# Altium PCB SGK_DVR_01.PcbDoc (part 3 of 7)
Units mil, origin at the board's own origin, x right, y up, seen from the top; angles counter-clockwise.
Board outline 3070.87 x 2598.47 mil, 6 copper layers (Top, L2 GND, l3 POWER, L4 SIG, L5 GND, Bottom), stack 58.1 mil thick; 475 components, 339 nets, 1964 pads, 1036 vias.
Unrouted connection lines stored in the file: 522.
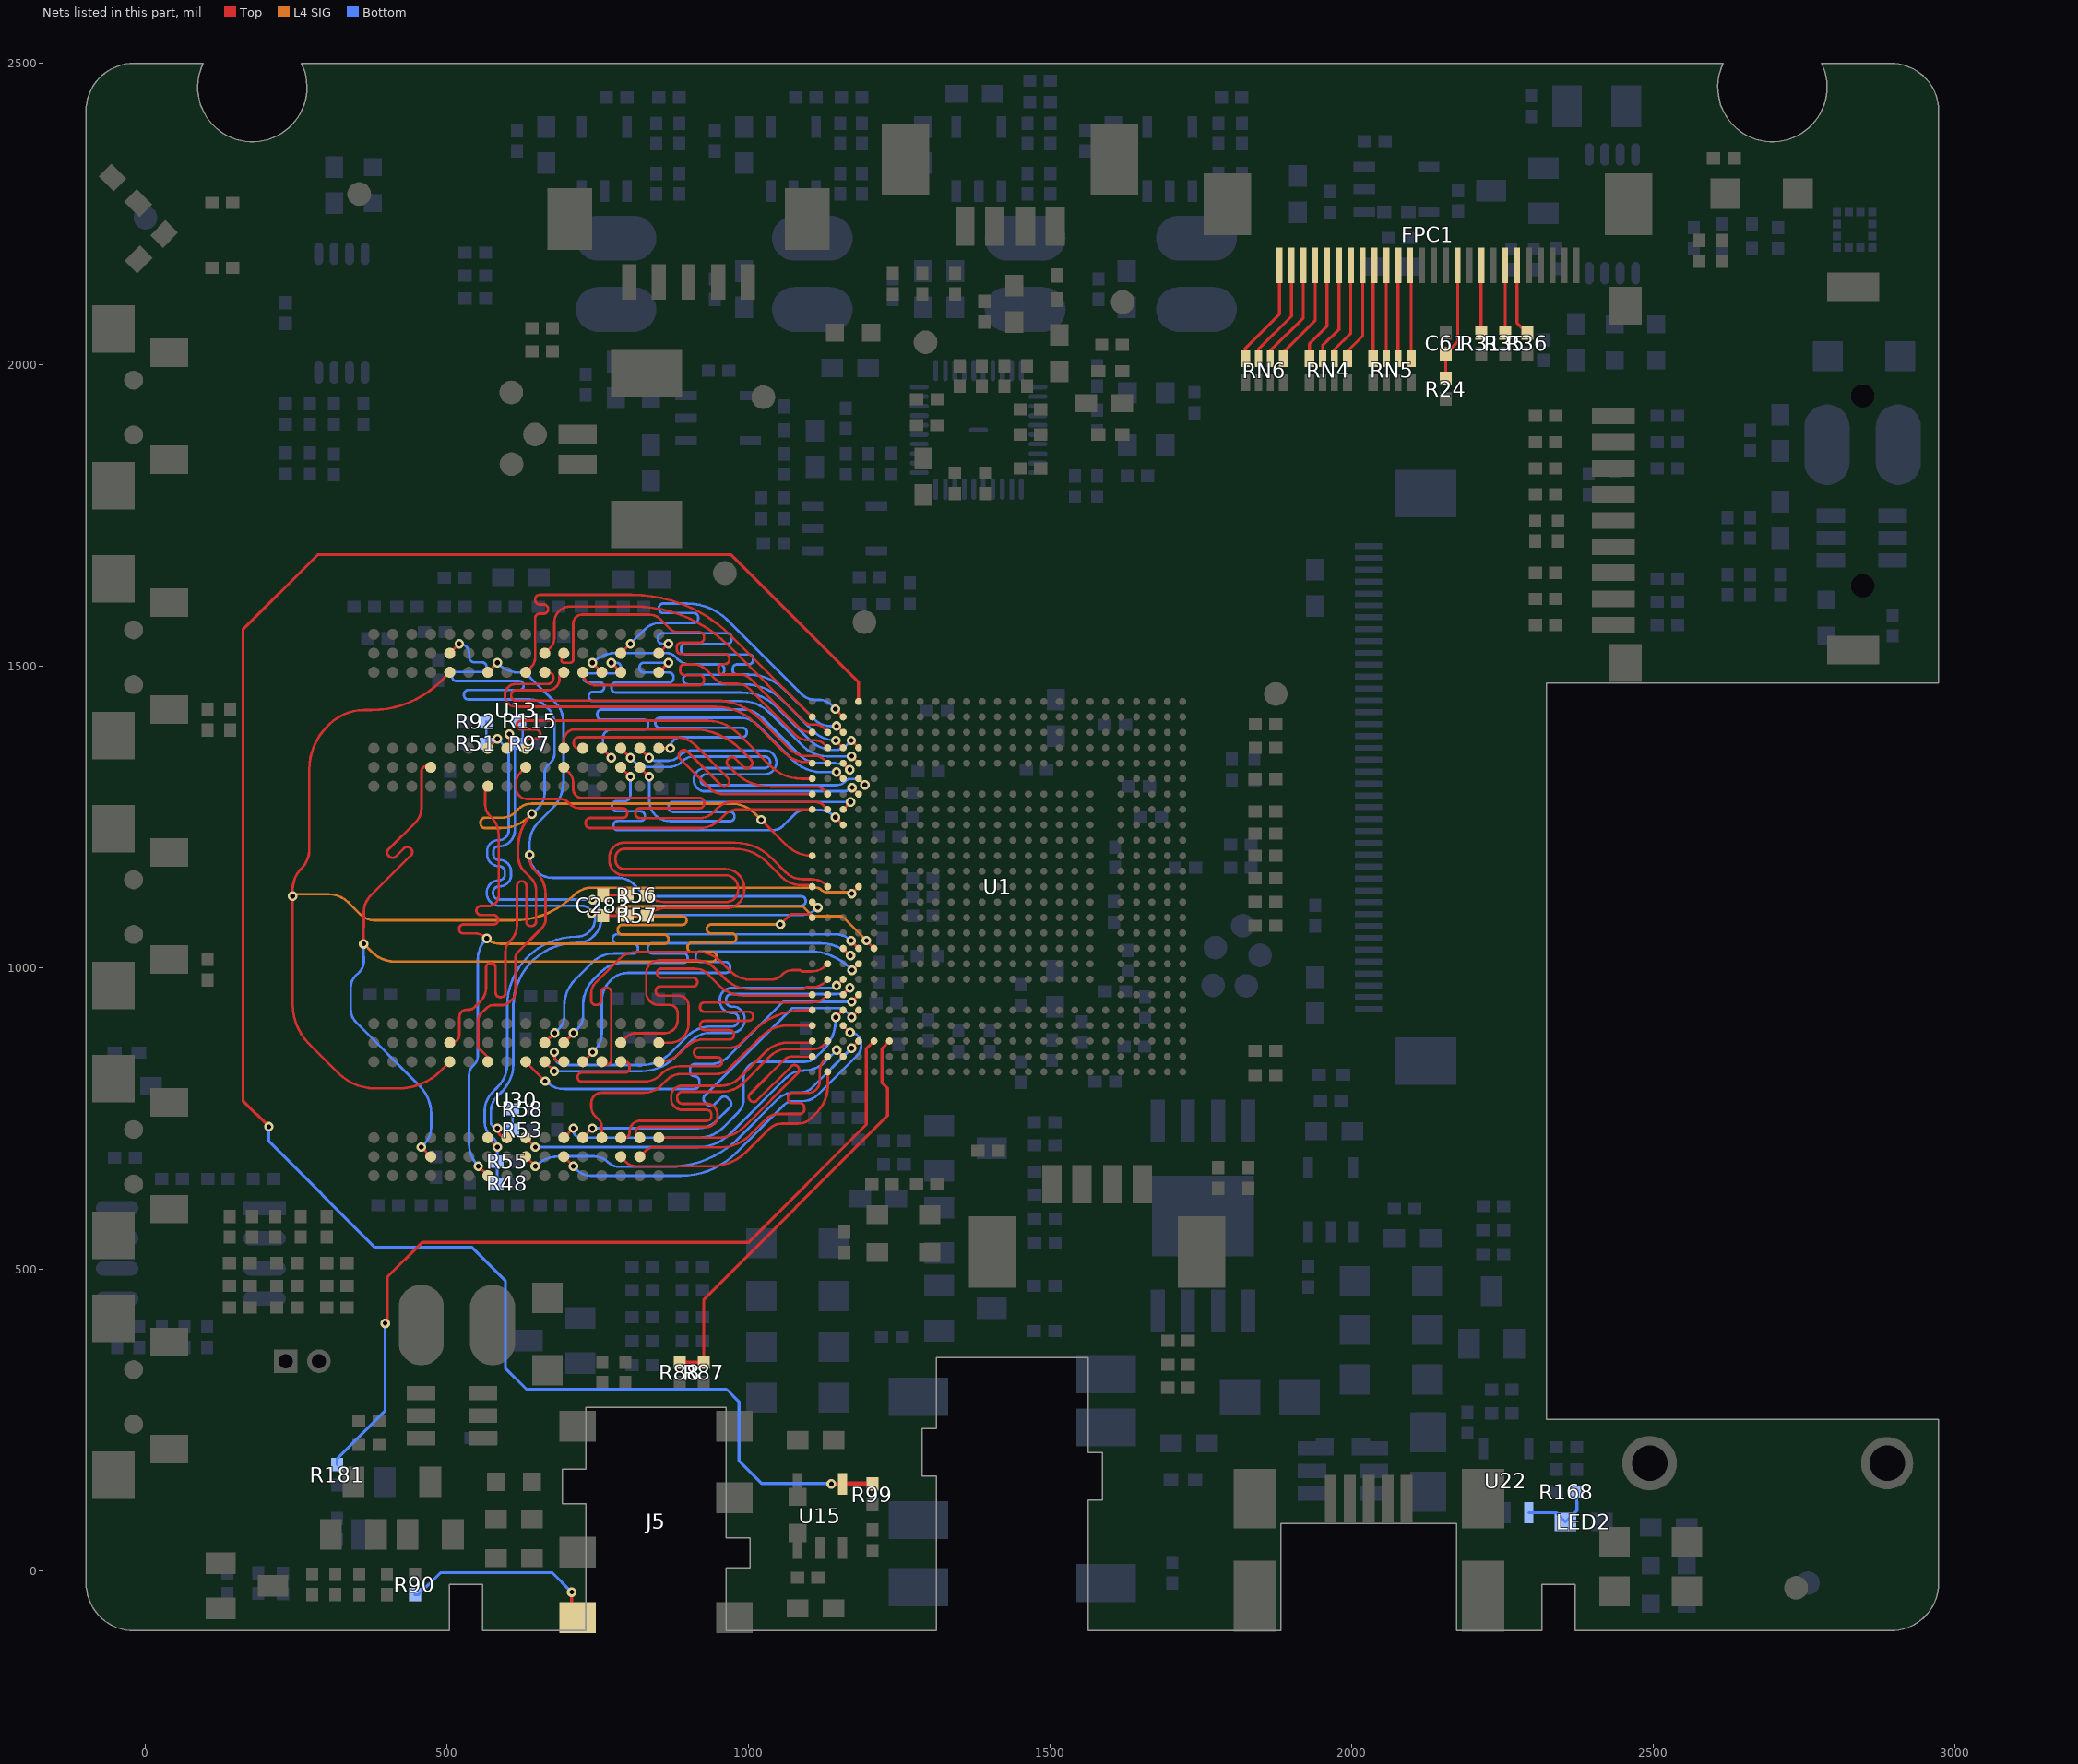
[diagram p5: the nets of this part, all layers, seen from the top]

## Via types
v1: diameter 15.75, hole 7.87, Top to Bottom, 800 vias
v2: diameter 20, hole 12, Top to Bottom, 204 vias
v3: diameter 23.62, hole 11.81, Top to Bottom, 31 vias
v4: diameter 14, hole 8, Top to Bottom, 1 vias

## Nets (pads, with @x,y where several pads share a name; then routed paths per layer and width w, separated by ;. In a path a pad name is that pad's centre, name@x,y a point inside that pad or via, vN(x,y) a via of type N, cw(c..) or ccw(c..) an arc to the next point about the centre after c; other vN are vias at no path point) (continued)
BA0: U1.AE11 U13.M2 U30.M2 | length 2469.7
  Top w4.2: U30.M2@504.55,876.27 506.78,876.27 ccw(c506.78,889.97) 520.47,889.97 520.47,918.89 cw(c532.46,918.89) 532.46,930.88 534.93,930.88 ccw(c534.93,946.47) 545.96,935.45 554.79,944.27 ccw(c531.22,967.84) 564.55,967.84 564.55,1000.94 cw(c571.9,1000.94) 571.9,1008.29 573.11,1008.29 cw(c573.11,1000.94) 580.46,1000.94 580.46,959.15 ccw(c587.81,959.15) 587.81,951.8 589.58,951.8 ccw(c589.58,959.15) 596.93,959.15 596.93,1027.69 cw(c620.56,1027.69) 603.85,1044.4 605.4,1045.94 ccw(c579.92,1071.42) 615.95,1071.42 615.95,1136.71 cw(c623.3,1136.71) 623.3,1144.06 623.99,1144.06 cw(c623.99,1136.71) 631.34,1136.71 631.34,1077.15 ccw(c638.69,1077.15) 638.69,1069.8 640.08,1069.8 ccw(c640.08,1077.15) 647.43,1077.15 647.43,1129.38 ccw(c619.48,1129.38) 639.24,1149.14 628.54,1159.84 cw(c654.4,1185.7) 617.83,1185.7 617.83,1200.27 cw(c695.94,1200.27) 639.06,1253.79 640.71,1255.45 v1(640.71,1255.5) ; U13.M2@504.55,1521.94 v1(520.29,1537.69) ; v1(1020.62,1245.85) 1062.56,1203.91 ; 1062.56,1203.91 ccw(c1105.34,1246.7) U1.AE11@1105.34,1186.19 cw(c1105.34,1246.7) 1062.56,1203.91
  L4 SIG w4.2: v1(640.71,1255.5) v1@637.3,1252.09 ; v1(1020.62,1245.85) 1009.86,1256.61 ; 555.54,1239.38 ccw(c562.89,1239.38) 562.89,1232.03 ; 555.54,1239.38 ccw(c562.89,1239.38) 562.89,1232.03 ; 555.54,1239.38 555.54,1241.93 ; 555.54,1241.93 cw(c562.89,1241.93) 562.89,1249.28 ; 555.54,1241.93 cw(c562.89,1241.93) 562.89,1249.28 ; 562.89,1232.03 588.87,1232.03 ; 562.89,1249.28 591.02,1249.28 ; 588.87,1232.03 ccw(c588.87,1300.51) v1@637.3,1252.09 ; 588.87,1232.03 ccw(c588.87,1300.51) v1@637.3,1252.09 ; 591.02,1249.28 ccw(c591.02,1279.78) 612.58,1258.21 ; 591.02,1249.28 ccw(c591.02,1279.78) 612.58,1258.21 ; 591.02,1249.28 ccw(c591.02,1279.78) 612.58,1258.21 ; 591.02,1249.28 ccw(c591.02,1279.78) 612.58,1258.21 ; 591.02,1249.28 ccw(c591.02,1279.78) 612.58,1258.21 ; 591.02,1249.28 ccw(c591.02,1279.78) 612.58,1258.21 ; 612.58,1258.21 617.75,1263.38 ; 617.75,1263.38 cw(c640.31,1240.82) 640.31,1272.73 ; 617.75,1263.38 cw(c640.31,1240.82) 640.31,1272.73 ; 640.31,1272.73 970.95,1272.73 ; 970.95,1272.73 cw(c970.95,1217.69) 1009.86,1256.61 ; 970.95,1272.73 cw(c970.95,1217.69) 1009.86,1256.61
  Bottom w4.2: v1(520.29,1537.69) cw(c520.29,1521.38) 536.61,1521.38 536.61,1516.51 ccw(c546.24,1516.51) 546.24,1506.88 558.11,1506.88 cw(c558.11,1499.53) 565.46,1499.53 565.46,1498.23 cw(c558.11,1498.23) 558.11,1490.88 515.57,1490.88 ccw(c515.57,1483.53) 508.22,1483.53 508.22,1483.28 ccw(c515.57,1483.28) 515.57,1475.93 619.69,1475.93 cw(c619.69,1468.58) 627.04,1468.58 627.04,1468.45 cw(c619.69,1468.45) 619.69,1461.1 535.23,1461.1 ccw(c535.23,1453.75) 527.88,1453.75 527.88,1452.7 ccw(c535.23,1452.7) 535.23,1445.35 637.91,1445.35 cw(c637.91,1409.61) 663.18,1434.88 667.52,1430.54 cw(c642.19,1405.21) 678.01,1405.21 678.01,1355.7 cw(c656.97,1355.7) 671.85,1340.83 667.18,1336.15 ccw(c680.67,1322.66) 661.59,1322.66 661.59,1289.78 cw(c629.22,1289.78) 652.11,1266.89 v1(640.71,1255.5)
BA1: U1.AE15 U13.N8 U30.N8 | length 1971.1
  Top w4.2: v1(361.8,1040.07) 361.93,1093.36 cw(c398.97,1093.36) 372.78,1119.55 440.31,1187.08 ; 440.32,1187.09 ccw(c435.11,1192.28) 442.46,1192.28 ccw(c435.11,1192.28) 440.31,1197.48 439.03,1198.75 ccw(c433.83,1193.56) 433.83,1200.91 ccw(c433.83,1193.56) 428.64,1198.75 414.83,1184.95 cw(c409.63,1190.14) 409.63,1182.79 cw(c409.63,1190.14) 404.44,1184.95 402.91,1186.47 cw(c408.11,1191.67) 400.76,1191.67 cw(c408.11,1191.67) 402.91,1196.87 447.63,1241.59 ccw(c423.97,1265.25) 457.43,1265.25 457.43,1326.1 cw(c466.14,1326.1) 460.78,1332.96 cw(c466.14,1326.1) 466.14,1334.81 471.2,1334.81 cw(c471.2,1332.96) U13.N8@473.05,1332.96 ; v1(457.3,703.04) U30.N8@473.05,687.29 ; v1(1052.52,1072.38) 1069.82,1089.68 1099.49,1089.68 U1.AE15@1105.34,1083.83
  L4 SIG w4.2: v1(361.8,1040.07) 374.92,1026.95 ; v1(1052.52,1072.38) 937.85,1072.38 ; 374.92,1026.95 ccw(c413.85,1065.88) 413.85,1010.82 ; 374.92,1026.95 ccw(c413.85,1065.88) 413.85,1010.82 ; 413.85,1010.82 939.46,1010.82 ; 898.52,1033.8 ccw(c905.87,1033.8) 905.87,1026.45 ; 898.52,1033.8 ccw(c905.87,1033.8) 905.87,1026.45 ; 898.52,1033.8 898.52,1034.86 ; 898.52,1034.86 cw(c905.87,1034.86) 905.87,1042.21 ; 898.52,1034.86 cw(c905.87,1034.86) 905.87,1042.21 ; 905.87,1026.45 939.46,1026.45 ; 905.87,1042.21 972.12,1042.21 ; 930.5,1064.71 ccw(c937.85,1064.71) 937.85,1057.36 ; 930.5,1064.71 ccw(c937.85,1064.71) 937.85,1057.36 ; 930.5,1064.71 930.5,1065.03 ; 930.5,1065.03 cw(c937.85,1065.03) 937.85,1072.38 ; 930.5,1065.03 cw(c937.85,1065.03) 937.85,1072.38 ; 937.85,1057.36 972.12,1057.36 ; 939.46,1010.82 ccw(c939.46,1018.17) 946.81,1018.17 ; 939.46,1010.82 ccw(c939.46,1018.17) 946.81,1018.17 ; 939.46,1026.45 cw(c939.46,1019.1) 946.81,1019.1 ; 939.46,1026.45 cw(c939.46,1019.1) 946.81,1019.1 ; 946.81,1018.17 946.81,1019.1 ; 972.12,1042.21 ccw(c972.12,1049.56) 979.47,1049.56 ; 972.12,1042.21 ccw(c972.12,1049.56) 979.47,1049.56 ; 972.12,1057.36 cw(c972.12,1050.01) 979.47,1050.01 ; 972.12,1057.36 cw(c972.12,1050.01) 979.47,1050.01 ; 979.47,1049.56 979.47,1050.01
  Bottom w4.2: v1(361.8,1040.07) 361.8,1028.59 361.83,1028.55 361.9,1010.56 361.9,1010.48 cw(c338.19,1010.48) 354.95,993.72 347.76,986.53 ccw(c366.12,968.17) 340.16,968.17 340.16,932.53 ccw(c372.69,932.53) 349.68,909.54 454.23,804.91 cw(c407.23,757.94) 473.67,757.94 473.67,736.77 cw(c431.77,736.77) 461.4,707.14 v1(457.3,703.04)
BA2: U1.AB13 U13.M3 U30.M3 | length 2434.6
  Top w4.2: U30.M3@504.55,844.78 489.07,829.3 cw(c419.82,898.56) 419.82,800.62 380.63,800.62 cw(c380.63,886.41) 319.96,825.75 271.04,874.67 cw(c336.3,939.94) 244,939.94 v1(244,1119.4) 244,1129.24 cw(c295.98,1129.24) 259.23,1166 ccw(c229.44,1195.78) 271.57,1195.78 271.57,1329.17 cw(c371.84,1329.17) 300.94,1400.08 304.96,1404.1 cw(c362.63,1346.44) 362.63,1427.99 375.23,1427.99 ccw(c375.23,1589.42) 489.37,1475.27 U13.M3@504.55,1490.44 ; v1(1170.98,1123.4) U1.AB13@1182.11,1135.01
  L4 SIG w4.2: v1(1170.98,1123.4) 1168.62,1125.75 1130.68,1125.75 ; v1@251.25,1122.4 ccw(c251.25,1112.16) v1(244,1119.4) cw(c251.25,1112.16) v1@251.25,1122.4 ; v1@251.25,1122.4 303.9,1122.4 ; 303.9,1122.4 cw(c303.9,1076.52) 336.34,1108.96 ; 303.9,1122.4 cw(c303.9,1076.52) 336.34,1108.96 ; 303.9,1122.4 cw(c303.9,1076.52) 336.34,1108.96 ; 303.9,1122.4 cw(c303.9,1076.52) 336.34,1108.96 ; 303.9,1122.4 cw(c303.9,1076.52) 336.34,1108.96 ; 303.9,1122.4 cw(c303.9,1076.52) 336.34,1108.96 ; 336.34,1108.96 356.67,1088.64 ; 356.67,1088.64 ccw(c379.67,1111.64) 378,1079.15 ; 356.67,1088.64 ccw(c379.67,1111.64) 378,1079.15 ; 378,1079.15 ccw(c379.67,1111.64) 379.67,1079.11 ; 378,1079.15 ccw(c379.67,1111.64) 379.67,1079.11 ; 379.67,1079.11 610.07,1079.11 ; 610.07,1079.11 ccw(c610.07,1220.03) 709.72,1120.39 ; 610.07,1079.11 ccw(c610.07,1220.03) 709.72,1120.39 ; 709.72,1120.39 710.57,1121.23 ; 710.57,1121.23 cw(c739.4,1092.4) 739.4,1133.17 ; 710.57,1121.23 cw(c739.4,1092.4) 739.4,1133.17 ; 739.4,1133.17 1112.76,1133.17 ; 1112.76,1133.18 cw(c1112.76,1123.86) 1119.35,1130.45 ; 1112.76,1133.18 cw(c1112.76,1123.86) 1119.35,1130.45 ; 1112.76,1133.18 cw(c1112.76,1123.86) 1119.35,1130.45 ; 1112.76,1133.18 cw(c1112.76,1123.86) 1119.35,1130.45 ; 1112.76,1133.18 cw(c1112.76,1123.86) 1119.35,1130.45 ; 1112.76,1133.18 cw(c1112.76,1123.86) 1119.35,1130.45 ; 1119.35,1130.45 ccw(c1130.68,1141.78) 1130.68,1125.75 ; 1119.35,1130.45 ccw(c1130.68,1141.78) 1130.68,1125.75
BC_DET: R181.2 U1.AA23 | length 1387.9
  Top w5: v1(397.38,410.98) 400.72,414.32 400.72,487.64 458.56,545.48 999.91,545.49 1195.09,740.66 1195.09,866.49 U1.AA23@1207.71,879.1
  Bottom w5: R181.2@317.88,176.89 317.88,186.79 397.38,266.29 v1(397.38,410.98)
BC_DETA: J5.4 R90.1 | length 334.9
  Top w5: v1(706.62,-34.72) 706.62,-57.82 707.07,-57.82 716.54,-67.28 J5.4@716.54,-76.77
  Bottom w5: R90.1@446.68,-38.94 452.58,-38.94 489.12,-2.4 674.3,-2.4 v1(706.62,-34.72)
BC_INDET: R87.1 R88.2 U1.Y23 | length 707.3
  Top w5: R88.2@886,346.78 R87.1@925.6,346.78 925.6,415.97 925.6,450.84 1230.27,755.5 1230.27,800.55 1220.76,810.05 1220.76,866.58 U1.Y23@1233.3,879.1
BC_PWREN: R99.1 U1.AB1 U15.4 | length 3436.3
  Top w5: v1(204.64,737.02) 161.61,780.06 161.61,1561.34 285.64,1685.37 970.7,1685.37 1182.11,1473.97 U1.AB1@1182.11,1442.1 ; v1(1136.95,144.72) U15.4@1155.68,144.72
  Top w8: U15.4@1155.68,144.72 1204.71,144.72 R99.1@1204.94,144.49
  Bottom w5: v1(204.64,737.02) 204.64,712.65 380.19,537.1 541.12,537.1 596.68,481.54 596.68,336.53 631.33,301.88 963.01,301.88 984,280.89 984,182.8 1021.28,145.53 1106.32,145.53 1136.95,145.47 v1(1136.95,144.72)
CAS#: U1.AE14 U13.K3 U30.K3 | length 2323.9
  Top w4.2: U30.K3@567.54,844.78 567.54,852.11 551.76,867.88 551.76,914.58 cw(c565.42,914.58) 555.76,924.23 565.18,933.65 cw(c577.11,921.72) 577.11,938.59 590.95,938.59 ccw(c590.95,956.8) 603.83,943.92 607.88,947.98 ccw(c594.44,961.43) 613.45,961.43 613.45,1016.34 cw(c628.66,1016.34) 617.91,1027.09 656.75,1065.93 ccw(c640.63,1082.04) 663.42,1082.04 663.42,1121.89 ccw(c610.87,1121.89) 648.03,1159.05 645.47,1161.61 cw(c665.86,1182) 637.02,1181.99 637.02,1183.95 v1(637.02,1187.58) ; U13.K3@567.54,1490.44 v1(583.29,1506.19) ; U1.AE14@1105.34,1109.42 v1(1114.74,1100.45)
  Bottom w4.2: v1(583.29,1506.19) 583.29,1505.91 585.19,1504 ccw(c618.63,1537.45) 618.63,1490.15 cw(c618.63,1463.38) 637.56,1482.31 679.31,1440.56 cw(c646.46,1407.72) 692.91,1407.72 692.91,1309.59 cw(c628.77,1309.59) 674.13,1264.23 651.09,1241.19 ccw(c685.04,1207.24) 637.02,1207.24 637.02,1191.71 v1(637.02,1187.58) ; v1(637.02,1187.58) ccw(c675.1,1187.58) 675.1,1149.5 ; v1(637.02,1187.58) ccw(c675.1,1187.58) 675.1,1149.5 ; v1(637.02,1187.58) ccw(c675.1,1187.58) 675.1,1149.5 ; v1(637.02,1187.58) ccw(c675.1,1187.58) 675.1,1149.5 ; v1(637.02,1187.58) ccw(c675.1,1187.58) 675.1,1149.5 ; v1(637.02,1187.58) ccw(c675.1,1187.58) 675.1,1149.5 ; 675.1,1149.5 785.11,1149.5 ; 785.11,1149.5 cw(c785.11,1115.96) 808.82,1139.68 ; 785.11,1149.5 cw(c785.11,1115.96) 808.82,1139.68 ; 808.82,1139.68 819.26,1129.24 ; 819.26,1129.24 ccw(c843.67,1153.66) 843.67,1119.13 ; 819.26,1129.24 ccw(c843.67,1153.66) 843.67,1119.13 ; 836.89,1095.25 ccw(c844.24,1095.25) 844.24,1087.9 ; 836.89,1095.25 ccw(c844.24,1095.25) 844.24,1087.9 ; 836.89,1095.25 836.89,1095.94 ; 836.89,1095.94 cw(c844.24,1095.94) 844.24,1103.29 ; 836.89,1095.94 cw(c844.24,1095.94) 844.24,1103.29 ; 843.67,1119.13 1087.03,1119.13 ; 844.24,1087.9 1084.45,1087.9 ; 844.24,1103.29 1087.03,1103.29 ; 1084.45,1087.9 ccw(c1084.45,1130.74) v1(1114.74,1100.45) cw(c1084.45,1130.74) 1084.45,1087.9 ; 1087.03,1103.29 ccw(c1087.03,1110.64) 1094.38,1110.64 ; 1087.03,1103.29 ccw(c1087.03,1110.64) 1094.38,1110.64 ; 1087.03,1119.13 cw(c1087.03,1111.78) 1094.38,1111.78 ; 1087.03,1119.13 cw(c1087.03,1111.78) 1094.38,1111.78 ; 1094.38,1110.64 1094.38,1111.78
CHRG: LED2.2 R168.1 U22.1 | length 125.1
  Bottom w5: U22.1@2292.95,97.14 2338.73,97.14 LED2.2@2354.17,81.69 2372.74,100.27 R168.1@2372.64,131.53
CKE: U1.AA17 U13.K9 U30.K9 | length 2049.8
  Top w4.2: v1(551.79,671.55) U30.K9@567.54,655.8 ; 563.09,1280.24 563.09,1271.23 ccw(c589.04,1271.23) 570.69,1252.88 573.19,1250.38 cw(c543.42,1220.61) 585.53,1220.61 585.53,1120.17 cw(c568.29,1120.17) 568.29,1102.94 555.9,1102.94 ccw(c555.9,1095.59) 548.55,1095.59 548.55,1095.47 ccw(c555.9,1095.47) 555.9,1088.12 577.04,1088.12 cw(c577.04,1080.77) 584.39,1080.77 584.39,1079.71 cw(c577.04,1079.71) 577.04,1072.36 527.14,1072.36 ccw(c527.14,1065.01) 519.79,1065.01 519.79,1064.79 ccw(c527.14,1064.79) 527.14,1057.44 545.81,1057.44 cw(c545.81,1029.34) v1(565.68,1049.21) ; 563.09,1280.24 563.09,1297.02 U13.K9@567.54,1301.47 ; v1(1195.1,1045.64) U1.AA17@1207.71,1032.65
  L4 SIG w4.2: v1(1195.1,1045.64) 1154.53,1086.21 1105.99,1086.21 1089.98,1102.21 788.98,1102.21 ; 587.55,1040.15 cw(c587.55,1071.08) v1(565.68,1049.21) ccw(c587.55,1071.08) 587.55,1040.15 ; 587.55,1040.15 859.7,1040.15 ; 781.63,1093.7 ccw(c788.98,1093.7) 788.98,1086.35 ; 781.63,1093.7 ccw(c788.98,1093.7) 788.98,1086.35 ; 781.63,1093.7 781.63,1094.86 ; 781.63,1094.86 cw(c788.98,1094.86) 788.98,1102.21 ; 781.63,1094.86 cw(c788.98,1094.86) 788.98,1102.21 ; 782.9,1062.89 ccw(c790.25,1062.89) 790.25,1055.54 ; 782.9,1062.89 ccw(c790.25,1062.89) 790.25,1055.54 ; 782.9,1062.89 782.9,1064.29 ; 782.9,1064.29 cw(c790.25,1064.29) 790.25,1071.64 ; 782.9,1064.29 cw(c790.25,1064.29) 790.25,1071.64 ; 788.98,1086.35 889.71,1086.35 ; 790.25,1055.54 859.7,1055.54 ; 790.25,1071.64 889.71,1071.64 ; 859.7,1040.15 ccw(c859.7,1047.5) 867.05,1047.5 ; 859.7,1040.15 ccw(c859.7,1047.5) 867.05,1047.5 ; 859.7,1055.54 cw(c859.7,1048.19) 867.05,1048.19 ; 859.7,1055.54 cw(c859.7,1048.19) 867.05,1048.19 ; 867.05,1047.5 867.05,1048.19 ; 889.71,1071.64 ccw(c889.71,1078.99) 897.06,1078.99 cw(c889.71,1078.99) 889.71,1071.64 ; 889.71,1086.35 cw(c889.71,1079) 897.06,1079 ccw(c889.71,1079) 889.71,1086.35
  Bottom w4.2: v1(551.79,671.55) cw(c589.17,708.93) 536.31,708.93 536.31,822.88 cw(c556.23,822.88) 542.14,836.97 544.89,839.72 ccw(c530.58,854.03) 550.81,854.03 550.81,1013.33 cw(c601.56,1013.33) v1(565.68,1049.21)
CLK: R56.1 U1.AD13 | length 811.8
  Top w4.2: R56.1@832.02,1120.89 ccw(c859.09,1147.96) 859.09,1109.67 962.76,1109.67 ccw(c962.76,1129.27) 982.36,1129.27 982.36,1133.03 ccw(c961.5,1133.03) 961.5,1153.9 793.74,1153.9 cw(c793.74,1178.65) 768.99,1178.65 768.99,1183.25 cw(c793.76,1183.25) 793.76,1208.02 976.73,1208.02 cw(c976.73,1122.53) 1037.18,1182.98 1061.2,1158.96 ccw(c1088.89,1186.66) 1088.89,1147.49 1104.06,1147.49 cw(c1104.06,1112.76) 1128.62,1137.32 U1.AD13@1130.93,1135.01
CLK#: R57.1 U1.AE13 | length 783.6
  Top w4.2: R57.1@832.02,1086.89 cw(c862.2,1056.71) 862.2,1099.39 962.7,1099.39 ccw(c962.7,1129.25) 992.56,1129.25 992.56,1133.11 ccw(c961.53,1133.07) 961.53,1164.11 793.97,1164.11 cw(c793.97,1178.89) 779.19,1178.89 779.19,1183.11 cw(c793.89,1183.11) 793.89,1197.81 976.24,1197.81 cw(c976.24,1121.31) 1030.34,1175.4 1054.13,1151.61 ccw(c1088.69,1186.17) 1088.69,1137.29 1103.05,1137.29 U1.AE13@1105.34,1135.01
CMOS_D0: FPC1.26 RN6.8 | length 178.5
  Top w5: RN6.8@1823.28,2010.35 1823.28,2027.74 1879.92,2084.38 FPC1.26@1879.92,2165.35
CMOS_D1: FPC1.25 RN6.7 | length 177.7
  Top w5: RN6.7@1844.93,2010.35 1844.93,2026.05 1899.61,2080.72 FPC1.25@1899.61,2165.35
CMOS_D2: FPC1.24 RN6.6 | length 177.7
  Top w5: RN6.6@1864.62,2010.35 1864.62,2023.54 1919.29,2078.21 FPC1.24@1919.29,2165.35
CMOS_D3: FPC1.23 RN6.5 | length 176.8
  Top w5: RN6.5@1886.27,2010.35 1886.27,2020.62 1938.98,2073.32 FPC1.23@1938.98,2165.35
CMOS_D4: FPC1.22 RN4.8 | length 167
  Top w5: RN4.8@1929.6,2010.35 1929.6,2034.96 1958.66,2064.01 FPC1.22@1958.66,2165.35
CMOS_D5: FPC1.21 RN4.7 | length 166.2
  Top w5: RN4.7@1951.26,2010.35 1951.26,2032.04 1978.35,2059.12 FPC1.21@1978.35,2165.35
CMOS_D6: FPC1.20 RN4.6 | length 166.2
  Top w5: RN4.6@1970.94,2010.35 1970.94,2025.67 1998.03,2052.76 FPC1.20@1998.03,2165.35
CMOS_D7: FPC1.19 RN4.5 | length 165.4
  Top w5: RN4.5@1992.6,2010.35 1992.6,2022.75 2017.72,2047.87 FPC1.19@2017.72,2165.35
CMOS_D8: FPC1.18 RN5.8 | length 156
  Top w5: RN5.8@2035.1,2010.35 2035.1,2163.05 FPC1.18@2037.4,2165.35
CMOS_D9: FPC1.17 RN5.7 | length 155.1
  Top w5: RN5.7@2056.75,2010.35 2056.75,2165.02 FPC1.17@2057.09,2165.35
CMOS_D10: FPC1.16 RN5.6 | length 155.1
  Top w5: RN5.6@2076.44,2010.35 2076.44,2165.02 FPC1.16@2076.77,2165.35
CMOS_D11: FPC1.15 RN5.5 | length 155.7
  Top w5: FPC1.15@2096.46,2165.35 2098.09,2163.72 RN5.5@2098.09,2010.35
CMOS_MCLK: C61.2 FPC1.11 R24.2 | length 195.9
  Top w5: R24.2@2155.51,1977.64 C61.2@2155.51,2018.7 2175.2,2038.38 FPC1.11@2175.2,2165.35
CMOS_PCLK: FPC1.9 R31.1 | length 112.9
  Top w5: R31.1@2214.07,2052.64 2214.07,2164.86 FPC1.9@2214.57,2165.35
CMOS_PWREN: FPC1.7 R35.1 | length 112.7
  Top w5: R35.1@2253.94,2052.64 FPC1.7@2253.94,2165.35
CMOS_RESET: FPC1.6 R36.1 | length 119.9
  Top w5: FPC1.6@2273.62,2165.35 2273.62,2069.92 R36.1@2290.91,2052.64
DDRCLK: C283.2 R53.1 R56.2 R58.2 R97.1 R115.2 U13.J7 U30.J7 | length 1887.4
  Top w4.2: v1(583.29,734.54) ccw(c599.03,734.54) U30.J7@599.03,718.79 ; v1(603.33,1387.93) 603.33,1374.82 ; v1(741.08,1113.54) 751.43,1113.54 C283.2@758.79,1120.89 R56.2@798.02,1120.89 ; 603.33,1374.82 cw(c588.67,1374.82) U13.J7@599.03,1364.46 ccw(c588.67,1374.82) 603.33,1374.82
  Bottom w4.2: v1(603.33,1387.93) 618.98,1372.27 620.07,1372.27 R97.1@625.43,1372.27 ; R58.2@608.46,766.02 R53.1@608.46,732.02 605.94,734.54 v1(583.29,734.54) ; R115.2@620.07,1409.38 625.43,1409.38 R97.1@625.43,1372.27 ; 572.5,745.33 ccw(c583.29,745.33) v1(583.29,734.54) ; 572.5,745.33 ccw(c583.29,745.33) v1(583.29,734.54) ; 572.5,745.33 572.5,762.7 ; 572.5,762.7 cw(c606.6,762.7) 582.49,786.81 ; 572.5,762.7 cw(c606.6,762.7) 582.49,786.81 ; 575.92,1124.57 ccw(c586.96,1124.57) 586.96,1113.54 ; 575.92,1124.57 ccw(c586.96,1124.57) 586.96,1113.54 ; 575.92,1124.57 ccw(c586.96,1124.57) 586.96,1113.54 ; 575.92,1124.57 575.92,1124.75 ; 575.92,1124.75 cw(c586.65,1124.75) 586.65,1135.47 ; 575.92,1124.75 cw(c586.65,1124.75) 586.65,1135.47 ; 575.92,1124.75 cw(c586.65,1124.75) 586.65,1135.47 ; 576.72,1188.61 ccw(c586.23,1188.61) 586.23,1179.11 ; 576.72,1188.61 ccw(c586.23,1188.61) 586.23,1179.11 ; 576.72,1188.61 ccw(c586.23,1188.61) 586.23,1179.11 ; 576.72,1188.61 576.72,1193.85 ; 576.72,1193.85 cw(c584.68,1193.85) 584.68,1201.81 ; 576.72,1193.85 cw(c584.68,1193.85) 584.68,1201.81 ; 576.72,1193.85 cw(c584.68,1193.85) 584.68,1201.81 ; 582.49,786.81 590.94,795.27 ; 584.68,1201.81 585.39,1201.81 ; 585.39,1201.81 ccw(c585.39,1228.83) 612.42,1228.83 ; 585.39,1201.81 ccw(c585.39,1228.83) 612.42,1228.83 ; 585.39,1201.81 ccw(c585.39,1228.83) 612.42,1228.83 ; 586.23,1179.11 586.98,1179.11 ; 586.65,1135.47 586.88,1135.47 ; 586.88,1135.47 ccw(c586.88,1154.56) 605.97,1154.56 ; 586.88,1135.47 ccw(c586.88,1154.56) 605.97,1154.56 ; 586.88,1135.47 ccw(c586.88,1154.56) 605.97,1154.56 ; 586.96,1113.54 v1(741.08,1113.54) 741.08,1111.25 748.87,1103.46 ; 586.98,1179.11 cw(c586.98,1160.12) 605.97,1160.12 ; 586.98,1179.11 cw(c586.98,1160.12) 605.97,1160.12 ; 586.98,1179.11 cw(c586.98,1160.12) 605.97,1160.12 ; 590.94,795.27 ccw(c545.27,840.94) 609.86,840.94 ; 590.94,795.27 ccw(c545.27,840.94) 609.86,840.94 ; 605.97,1154.56 605.97,1160.12 ; 609.86,840.94 609.86,937.01 ; 609.86,937.01 cw(c714.63,937.01) 714.63,1041.78 ; 609.86,937.01 cw(c714.63,937.01) 714.63,1041.78 ; 612.42,1228.83 612.42,1364.43 R97.1@620.07,1372.08 R97.1@625.43,1372.27 ; 714.63,1041.78 715.12,1041.78 ; 715.12,1041.78 ccw(c715.12,1082.17) 755.51,1082.17 ; 715.12,1041.78 ccw(c715.12,1082.17) 755.51,1082.17 ; 748.87,1103.46 cw(c732.83,1087.42) 755.51,1087.42 ; 748.87,1103.46 cw(c732.83,1087.42) 755.51,1087.42 ; 755.51,1082.17 755.51,1087.42
DDRCLK#: C283.1 R48.1 R51.1 R55.2 R57.2 R92.2 U13.K7 U30.K7 | length 2149.9
  Top w4.2: U30.K7@567.54,718.79 v1(583.29,703.04) ; U13.K7@567.54,1364.46 v1(583.29,1380.21) ; v1(739.52,1090.69) 754.99,1090.69 C283.1@758.79,1086.89 R57.2@798.02,1086.89
  Bottom w4.2: R51.1@565.08,1372.08 R51.1@565.08,1373.57 ; R92.2@565.08,1409.05 R51.1@565.08,1373.57 ; R48.1@583.05,642.98 R55.2@583.05,679.05 583.05,702.8 v1(583.29,703.04) ; 562.29,744.57 ccw(c591.47,744.57) 570.83,723.93 ; 562.29,744.57 ccw(c591.47,744.57) 570.83,723.93 ; 562.29,744.57 562.29,762.86 ; 562.29,762.86 cw(c606.26,762.86) 575.17,793.95 ; 562.29,762.86 cw(c606.26,762.86) 575.17,793.95 ; R51.1@565.08,1373.57 576.64,1373.57 v1(583.29,1380.21) 596.87,1366.62 ; 565.7,1124.58 ccw(c586.98,1124.58) 586.98,1103.3 ; 565.7,1124.58 ccw(c586.98,1124.58) 586.98,1103.3 ; 565.7,1124.58 ccw(c586.98,1124.58) 586.98,1103.3 ; 565.7,1124.58 565.7,1124.79 ; 565.7,1124.79 cw(c586.73,1124.79) 586.73,1145.82 ; 565.7,1124.79 cw(c586.73,1124.79) 586.73,1145.82 ; 565.7,1124.79 cw(c586.73,1124.79) 586.73,1145.82 ; 566.4,1188.79 ccw(c586.3,1188.79) 586.3,1168.89 ; 566.4,1188.79 ccw(c586.3,1188.79) 586.3,1168.89 ; 566.4,1188.79 ccw(c586.3,1188.79) 586.3,1168.89 ; 566.4,1188.79 566.4,1193.78 ; 566.4,1193.78 cw(c584.65,1193.78) 584.65,1212.03 ; 566.4,1193.78 cw(c584.65,1193.78) 584.65,1212.03 ; 566.4,1193.78 cw(c584.65,1193.78) 584.65,1212.03 ; 570.83,723.93 577.32,717.45 ; 575.17,793.95 583.42,802.21 ; 577.32,717.45 cw(c562.92,703.04) v1(583.29,703.04) ; 577.32,717.45 cw(c562.92,703.04) v1(583.29,703.04) ; 583.42,802.21 ccw(c544.23,841.39) 599.65,841.39 ; 583.42,802.21 ccw(c544.23,841.39) 599.65,841.39 ; 584.65,1212.03 585.41,1212.03 ; 585.41,1212.03 ccw(c585.41,1228.83) 602.22,1228.83 ; 585.41,1212.03 ccw(c585.41,1228.83) 602.22,1228.83 ; 585.41,1212.03 ccw(c585.41,1228.83) 602.22,1228.83 ; 586.3,1168.89 586.57,1168.89 ; 586.57,1168.89 cw(c586.57,1159.7) 595.77,1159.7 ; 586.57,1168.89 cw(c586.57,1159.7) 595.77,1159.7 ; 586.57,1168.89 cw(c586.57,1159.7) 595.77,1159.7 ; 586.73,1145.82 586.84,1145.82 ; 586.84,1145.82 ccw(c586.84,1154.75) 595.77,1154.75 ; 586.84,1145.82 ccw(c586.84,1154.75) 595.77,1154.75 ; 586.84,1145.82 ccw(c586.84,1154.75) 595.77,1154.75 ; 586.98,1103.3 724.69,1103.3 ; 595.77,1154.75 595.77,1159.7 ; 596.87,1366.62 cw(c583.97,1353.72) 602.22,1353.72 ; 596.87,1366.62 cw(c583.97,1353.72) 602.22,1353.72 ; 596.87,1366.62 cw(c583.97,1353.72) 602.22,1353.72 ; 596.87,1366.62 cw(c583.97,1353.72) 602.22,1353.72 ; 596.87,1366.62 cw(c583.97,1353.72) 602.22,1353.72 ; 596.87,1366.62 cw(c583.97,1353.72) 602.22,1353.72 ; 596.87,1366.62 cw(c583.97,1353.72) 602.22,1353.72 ; 596.87,1366.62 cw(c583.97,1353.72) 602.22,1353.72 ; 596.87,1366.62 cw(c583.97,1353.72) 602.22,1353.72 ; 599.65,841.39 599.65,937.06 ; 599.65,937.06 cw(c714.57,937.06) 714.57,1051.98 ; 599.65,937.06 cw(c714.57,937.06) 714.57,1051.98 ; 602.22,1228.83 602.22,1353.72 ; 714.57,1051.98 715.09,1051.98 ; 715.09,1051.98 ccw(c715.09,1082.18) 745.29,1082.18 ; 715.09,1051.98 ccw(c715.09,1082.18) 745.29,1082.18 ; 724.69,1103.3 cw(c724.69,1090.06) 734.05,1099.42 ; 724.69,1103.3 cw(c724.69,1090.06) 734.05,1099.42 ; 724.69,1103.3 cw(c724.69,1090.06) 734.05,1099.42 ; 724.69,1103.3 cw(c724.69,1090.06) 734.05,1099.42 ; 724.69,1103.3 cw(c724.69,1090.06) 734.05,1099.42 ; 724.69,1103.3 cw(c724.69,1090.06) 734.05,1099.42 ; 724.69,1103.3 cw(c724.69,1090.06) 734.05,1099.42 ; 724.69,1103.3 cw(c724.69,1090.06) 734.05,1099.42 ; 724.69,1103.3 cw(c724.69,1090.06) 734.05,1099.42 ; 734.05,1099.42 v1@737.22,1096.26 ; v1@737.22,1096.26 cw(c731.65,1090.69) v1(739.52,1090.69) ; v1@737.22,1096.26 cw(c731.65,1090.69) v1(739.52,1090.69) ; v1@737.22,1096.26 cw(c731.65,1090.69) v1(739.52,1090.69) ; v1(739.52,1090.69) v1@740.72,1090.69 ; v1@740.72,1090.69 cw(c740.72,1086.12) v1@745.29,1086.12 ; v1@740.72,1090.69 cw(c740.72,1086.12) v1@745.29,1086.12 ; 745.29,1082.18 v1@745.29,1086.12
DM0: U1.AB21 U30.E7 | length 666.4
  Top w4.2: U30.E7@725.02,718.79 v1(740.77,734.54) ; v1(1170.92,918.6) U1.AB21@1182.11,930.29
  Bottom w4.2: v1(740.77,734.54) 917.07,734.54 ccw(c917.07,775.45) 946,746.52 968.68,769.21 ccw(c962.74,775.14) 971.14,775.14 ccw(c962.74,775.14) 968.68,781.07 964.73,785.02 ccw(c959.5,779.78) 959.5,787.19 ccw(c959.5,779.78) 954.26,785.02 942.37,773.13 cw(c937.17,778.33) 937.17,770.98 cw(c937.17,778.33) 931.98,773.13 927.11,777.99 cw(c932.31,783.19) 924.96,783.19 cw(c932.31,783.19) 927.11,788.39 1072.41,933.69 1144.46,933.69 1155.84,933.69 v1(1170.92,918.6)
DM1: U1.AD18 U30.D3 | length 660.6
  Top w4.2: U30.D3@756.51,844.78 756.51,839.69 764.09,839.69 ccw(c764.09,847.83) 772.24,847.83 772.24,959.91 ccw(c764.89,959.91) 764.89,967.26 762.47,967.26 ccw(c762.47,959.91) 755.12,959.91 755.12,946.29 cw(c747.77,946.29) 747.77,938.94 746.23,938.94 cw(c746.23,946.29) 738.88,946.29 738.88,958.31 cw(c762.74,958.31) 745.86,975.18 785.6,1014.92 cw(c813.72,986.79) 813.72,1026.57 915.93,1026.57 cw(c915.93,972.74) 953.99,1010.8 970.76,994.03 ccw(c1002.11,1025.39) 1002.11,981.05 1038.06,981.05 ccw(c1038.06,1003.42) 1053.87,987.6 1056.38,990.1 cw(c1072.07,974.41) 1072.07,996.6 1085.07,996.6 1087.41,994.26 1103.16,994.26 ccw(c1103.16,1030.42) 1128.72,1004.85 U1.AD18@1130.93,1007.06
DM2: U1.AE7 U13.E7 | length 681.6
  Top w4.2: U13.E7@725.02,1364.46 717.34,1364.46 cw(c717.34,1371.81) 709.99,1371.81 709.99,1375.26 cw(c717.34,1375.26) 717.34,1382.61 880.64,1382.61 cw(c880.64,1340.17) 910.66,1370.18 965.91,1314.93 cw(c960.71,1309.73) 968.06,1309.73 cw(c960.71,1309.73) 965.91,1304.53 964.52,1303.14 cw(c959.32,1308.34) 959.32,1300.99 cw(c959.32,1308.34) 954.13,1303.14 897.76,1359.51 ccw(c892.56,1354.31) 892.56,1361.66 ccw(c892.56,1354.31) 887.37,1359.51 885.86,1358 ccw(c891.06,1352.81) 883.71,1352.81 ccw(c891.06,1352.81) 885.86,1347.61 935.77,1297.7 ccw(c957.85,1319.77) 957.85,1288.55 U1.AE7@1105.34,1288.55
DM3: U1.AC4 U13.D3 | length 642.1
  Top w4.2: v1(740.77,1506.19) U13.D3@756.51,1490.44 ; v1(1144.43,1377.42) U1.AC4@1156.52,1365.33
  Bottom w4.2: v1(740.77,1506.19) cw(c779.5,1467.46) 779.5,1522.24 803.76,1522.24 835.25,1522.24 865.04,1522.24 cw(c865.04,1505.12) 877.15,1517.22 881.85,1512.51 ccw(c903.57,1534.23) 903.57,1503.52 952.16,1503.52 cw(c952.16,1496.17) 959.51,1496.17 959.51,1493.86 cw(c952.16,1493.86) 952.16,1486.51 898.76,1486.51 ccw(c898.76,1479.16) 891.41,1479.16 891.41,1477.83 ccw(c898.76,1477.83) 898.76,1470.48 992.38,1470.48 cw(c992.38,1381.71) 1055.15,1444.48 1106.5,1393.13 ccw(c1144.43,1431.05) v1(1144.43,1377.42)
DQ0: U1.AB18 U30.E3 | length 714.8
  Top w4.2: U30.E3@725.02,844.78 v1(741.39,860.86) ; v1(1171.18,996.53) U1.AB18@1182.11,1007.06
  Bottom w4.2: v1(741.39,860.86) 744.94,864.4 ccw(c717.17,892.18) 756.44,892.18 756.44,944.85 cw(c805.25,944.85) 770.74,979.37 771.98,980.61 cw(c799.62,952.97) 799.62,992.05 961.63,992.05 ccw(c961.63,999.4) 968.98,999.4 968.98,1002.92 ccw(c961.63,1002.92) 961.63,1010.27 919.49,1010.27 cw(c919.49,1017.62) 912.14,1017.62 912.14,1020.5 cw(c919.49,1020.5) 919.49,1027.85 986.92,1027.85 1010.24,1027.85 1034.03,1027.85 1099.84,1027.85 cw(c1099.84,930.45) 1168.71,999.32 v1(1171.18,996.53)
DQ1: U1.AC21 U30.F7 | length 612.5
  Top w4.2: U30.F7@693.52,718.79 v1(709.27,734.54) ; v1(1144.46,918.46) U1.AC21@1156.52,930.29
  Bottom w4.2: v1(709.27,734.54) 709.27,730.78 ccw(c721.36,730.78) 721.36,718.69 740.77,718.69 917.04,718.69 ccw(c917.04,775.6) 957.28,735.36 982.12,760.19 ccw(c959.18,783.13) 991.62,783.13 991.62,819.02 cw(c1017.21,819.02) 1017.21,844.61 1093.79,844.61 ccw(c1093.79,869.64) 1111.49,851.94 1124.01,864.46 ccw(c1076.23,912.23) 1143.8,912.23 1143.8,917.8 v1(1144.46,918.46)
DQ2: U1.AC17 U30.F2 | length 731.1
  Top w4.2: U30.F2@693.52,876.27 v1(709.59,892.37) ; U1.AC17@1156.52,1032.65 v1(1168.73,1020.66)
  Bottom w4.2: v1(709.59,892.37) 716.41,899.19 ccw(c694.38,921.23) 725.54,921.23 725.54,938.86 cw(c785.43,938.86) 743.08,981.21 756.05,994.17 cw(c790.68,959.54) 790.68,1008.52 891.36,1008.52 ccw(c891.36,1015.87) 898.71,1015.87 898.71,1017.02 ccw(c891.36,1017.02) 891.36,1024.37 839.98,1024.37 cw(c839.98,1031.72) 832.63,1031.72 832.63,1033.76 cw(c839.98,1033.76) 839.98,1041.11 1119.34,1041.11 cw(c1119.34,971.27) v1(1168.73,1020.66)
DQ3: U1.AC22 U30.F8 | length 639.2
  Top w4.2: U30.F8@693.52,687.29 v1(709.27,671.55) ; U1.AC22@1156.52,904.69 v1(1168.03,893.15)
  Bottom w4.2: v1(709.27,671.55) 716.34,664.48 ccw(c737.56,685.69) 737.56,655.69 740.77,655.69 772.26,655.69 835.25,655.69 866.75,655.69 888.03,655.69 ccw(c888.03,783.88) 978.68,693.24 1058.09,772.65 cw(c1074.3,756.45) 1074.3,779.37 1088.62,779.37 ccw(c1088.62,816.57) 1114.93,790.26 1179.81,855.14 ccw(c1163.66,871.29) 1186.5,871.29 1186.5,874.68 ccw(c1168.03,874.68) v1(1168.03,893.15)
DQ4: U1.AB20 U30.H3 | length 672.7
  Top w4.2: U30.H3@630.53,844.78 v1(662.75,812.56) ; v1(1170.77,944.05) U1.AB20@1182.11,955.88
  Bottom w4.2: v1(662.75,812.56) ccw(c694.51,844.32) 694.51,799.4 909,799.4 ccw(c909,808.72) 918.32,808.72 918.32,812.56 ccw(c910.19,812.56) 910.19,820.69 910.14,820.69 cw(c910.14,828.04) 902.79,828.04 902.79,832.4 cw(c911.45,832.4) 911.45,841.05 937.18,841.05 ccw(c937.18,881.85) 966.03,853 1057.08,944.05 v1(1170.77,944.05)
DQ5: U1.AB23 U30.H8 | length 643.7
  Top w4.2: U30.H8@630.53,687.29 v1(646.28,671.55) ; v1(1170.44,867.22) U1.AB23@1182.11,879.1
  Bottom w4.2: v1(646.28,671.55) cw(c685.36,632.47) 685.36,687.74 743.94,687.74 cw(c743.94,655.61) 766.65,678.33 ccw(c785.48,697.16) 785.48,670.53 868.49,670.53 ccw(c868.49,833.07) 983.43,718.13 1047.1,781.81 cw(c1075.85,753.06) 1075.85,793.72 1086.55,793.72 ccw(c1086.55,818.77) 1104.27,801.06 v1(1170.44,867.22)
DQ6: U1.AB17 U30.G2 | length 718.4
  Top w4.2: U30.G2@662.03,876.27 v1(678.4,892.35)
  Top w4.5: v1(1169.63,1045.44) U1.AB17@1182.11,1032.65
  Bottom w4.2: v1(678.4,892.35) 686.13,900.09 ccw(c666.82,919.4) 694.13,919.4 694.13,936.41 cw(c757.56,936.41) 712.71,981.26 741.18,1009.72 cw(c776.33,974.58) 776.33,1024.28 809.04,1024.28 ccw(c809.04,1031.63) 816.39,1031.63 816.39,1033.13 ccw(c809.04,1033.13) 809.04,1040.48 781.8,1040.48 cw(c781.8,1047.83) 774.45,1047.83 774.45,1048.65 cw(c781.8,1048.65) 781.8,1056 1144.14,1056 cw(c1144.14,1019.95) v1(1169.63,1045.44)
DQ7: U1.AC24 U30.H7 | length 596.2
  Top w4.2: U30.H7@630.53,718.79 v1(646.28,703.04) ; v1(1145.8,863.95) U1.AC24@1156.52,853.51
  Bottom w4.2: v1(646.28,703.04) 875.89,703.04 914.97,703.04 ccw(c914.97,780.68) 969.87,725.78 1062.44,818.35 cw(c1090.71,790.07) 1090.71,830.06 1091.13,830.06 ccw(c1091.13,880.23) 1126.6,844.76 v1(1145.8,863.95)
DQ8: U1.AE22 U30.D7 | length 478.3
  Top w4.2: U30.D7@756.51,718.79 756.51,734.54 756.51,736.02 ccw(c737.65,736.02) 750.99,749.37 745.03,755.32 cw(c759.66,769.96) 738.97,769.96 738.97,776.22 cw(c756.04,776.22) 756.04,793.3 826.96,793.3 ccw(c826.96,831.71) 854.12,804.55 864.09,814.52 cw(c888.14,790.47) 888.14,824.48 946.66,824.48 ccw(c946.66,853.43) 967.14,832.96 1020.98,886.8 cw(c1064.17,843.61) 1064.17,904.69 U1.AE22@1105.34,904.69
DQ9: U1.AE21 U30.C3 | length 647.9
  Top w4.2: U30.C3@788.01,844.78 795.12,844.78 cw(c795.12,837.43) 802.47,837.43 802.47,834.05 cw(c795.12,834.05) 795.12,826.7 723.64,826.7 ccw(c723.64,819.35) 716.29,819.35 716.29,818.97 ccw(c723.64,818.97) 723.64,811.62 826.36,811.62 ccw(c826.36,851.07) 854.26,823.18 856.14,825.06 cw(c885.55,795.64) 885.55,837.24 948.55,837.24 ccw(c948.55,844.59) 955.9,844.59 955.9,844.79 ccw(c948.55,844.79) 948.55,852.14 916.72,852.14 cw(c916.72,859.49) 909.37,859.49 909.37,860.49 cw(c916.72,860.49) 916.72,867.84 968.83,867.84 ccw(c968.83,894.5) 987.68,875.65 1006.79,894.76 cw(c1092.56,808.99) 1092.56,930.28 U1.AE21@1105.34,930.29
DQ10: U1.AD25 U30.C8 | length 433.5
  Top w4.2: U30.C8@788.01,687.29 798.02,677.28 ccw(c811.96,691.23) 811.96,671.51 938.6,671.51 ccw(c938.6,752.37) 995.78,695.19 1033.98,733.39 cw(c1055.09,712.28) 1055.09,742.14 1082.33,742.14 ccw(c1082.33,770.72) 1102.54,750.51 1113.36,761.33 ccw(c1070.94,803.75) 1130.93,803.75 U1.AD25@1130.93,827.92
DQ11: U1.AD19 U30.C2 | length 561
  Top w4.2: U30.C2@788.01,876.27 797.53,885.79 cw(c812.8,870.51) 812.8,892.11 860.71,892.11 ccw(c860.71,913.6) 882.19,913.6 882.19,923.52 882.19,925.83 ccw(c869.08,925.83) 869.08,938.95 851.03,938.95 cw(c851.03,959.84) 830.14,959.84 830.14,991.92 cw(c850.92,991.92) 850.92,1012.7 913.81,1012.7 cw(c913.81,972.92) 941.94,1001.05 960.28,982.72 ccw(c1002.66,1025.1) 1002.66,965.16 1089.18,965.16 ccw(c1089.18,972.51) 1094.37,967.31 cw(c1097.65,964.04) 1097.65,968.67 1106.61,968.67 ccw(c1106.61,996.5) 1126.28,976.82 U1.AD19@1130.93,981.47
DQ12: U1.AE24 U30.A7 | length 529.3
  Top w4.2: U30.A7@851,718.79 947.78,718.79 ccw(c947.78,783.32) 993.41,737.69 1081.64,825.92 ccw(c1076.44,831.11) 1083.79,831.11 ccw(c1076.44,831.11) 1081.64,836.31 1080.8,837.16 ccw(c1075.6,831.95) 1075.6,839.31 ccw(c1075.6,831.95) 1070.4,837.16 1013.46,780.21 cw(c1008.26,785.41) 1008.26,778.06 cw(c1008.26,785.41) 1003.07,780.21 1002.23,781.05 cw(c1007.43,786.24) 1000.08,786.24 cw(c1007.43,786.24) 1002.23,791.44 1058.93,848.13 cw(c1071.92,835.14) 1071.92,853.51 U1.AE24@1105.34,853.51
DQ13: U1.AE20 U30.A2 | length 596.4
  Top w4.2: U30.A2@851,876.27 869.43,876.27 ccw(c869.43,906.99) 900.15,906.99 900.15,938.06 ccw(c883.93,938.06) 883.93,954.28 853.17,954.28 cw(c853.17,961.63) 845.82,961.63 845.82,962.06 cw(c853.17,962.06) 853.17,969.41 907.6,969.41 ccw(c907.6,976.76) 914.95,976.76 914.95,976.82 ccw(c907.6,976.82) 907.6,984.17 855.22,984.17 cw(c855.22,991.52) 847.87,991.52 847.87,991.79 cw(c855.22,991.79) 855.22,999.14 910.95,999.14 cw(c910.95,969.84) 931.67,990.56 951.47,970.76 ccw(c990.74,1010.03) 990.74,954.49 1103.96,954.49 U1.AE20@1105.34,955.88
DQ14: U1.AD24 U30.B8 | length 455.4
  Top w4.2: U30.B8@819.51,687.29 829.8,697.59 cw(c842.7,684.69) 842.7,702.93 954.41,702.93 ccw(c954.41,769.12) 1001.21,722.32 1028.17,749.27 cw(c1049.77,727.68) 1049.77,758.22 1084.74,758.22 ccw(c1084.74,765.57) 1092.09,765.57 1092.09,768.88 ccw(c1084.74,768.88) 1084.74,776.23 1072.26,776.23 cw(c1072.26,783.58) 1064.91,783.58 1064.91,785.57 cw(c1072.26,785.57) 1072.26,792.92 1097.76,792.92 ccw(c1097.76,812.96) 1117.8,812.96 1117.8,827.92 1117.8,828.98 cw(c1145.35,828.98) 1125.87,848.45 U1.AD24@1130.93,853.51
DQ15: U1.AD20 U30.A3 | length 620.4
  Top w4.2: U30.A3@851,844.78 ccw(c851,894.7) 886.31,859.4 897.13,870.22 cw(c924.69,842.66) 924.69,881.64 968.26,881.64 ccw(c968.26,888.99) 975.61,888.99 975.61,889.89 ccw(c968.26,889.89) 968.26,897.24 926.82,897.24 cw(c926.82,904.59) 919.47,904.59 919.47,905.17 cw(c926.82,905.17) 926.82,912.52 1000.12,912.52 ccw(c1000.12,919.87) 1007.47,919.87 1007.47,920.2 ccw(c1000.12,920.2) 1000.12,927.55 926.54,927.55 cw(c926.54,934.9) 919.19,934.9 919.19,935.57 cw(c926.54,935.57) 926.54,942.92 1106.36,942.92 1106.72,943.28 ccw(c1106.72,971.31) 1126.54,951.49 U1.AD20@1130.93,955.88
DQ16: U1.AD4 U13.E3 | length 570.6
  Top w4.2: U13.E3@725.02,1490.44 ccw(c746.38,1490.44) 746.38,1469.09 917.99,1469.08 ccw(c917.99,1477.01) 925.91,1477.01 925.91,1478.44 ccw(c918.56,1478.44) 918.56,1485.79 893.69,1485.79 cw(c893.69,1493.14) 886.34,1493.14 886.34,1496.4 cw(c893.63,1496.4) 893.63,1503.68 908,1503.68 cw(c908,1473.81) 929.13,1494.93 945.6,1478.46 ccw(c962.28,1495.14) 962.28,1471.55 980.84,1471.55 cw(c980.84,1443.26) 1000.85,1463.27 1077.55,1386.57 ccw(c1098.84,1407.86) 1098.84,1377.75 1109.36,1377.75 cw(c1109.36,1355.67) 1124.97,1371.28 U1.AD4@1130.93,1365.33
DQ17: U1.AD7 U13.F7 | length 601.1
  Top w4.2: U13.F7@693.52,1364.46 693.52,1377.15 cw(c712.33,1377.15) 712.33,1395.96 906.57,1395.96 cw(c906.57,1283.36) 986.19,1362.98 1003.92,1345.25 cw(c998.72,1340.05) 1006.07,1340.05 cw(c998.72,1340.05) 1003.92,1334.85 1002.38,1333.32 cw(c997.18,1338.52) 997.18,1331.17 cw(c997.18,1338.52) 991.99,1333.32 977.54,1347.77 ccw(c972.34,1342.57) 972.34,1349.92 ccw(c972.34,1342.57) 967.14,1347.77 965.77,1346.4 ccw(c970.97,1341.2) 963.62,1341.2 ccw(c970.97,1341.2) 965.77,1336 975.97,1325.81 ccw(c1036.66,1386.49) 1036.66,1300.67 1111.64,1300.67 cw(c1111.64,1283.35) 1123.89,1295.59 U1.AD7@1130.93,1288.55
DQ18: U1.AE3 U13.F2 | length 724
  Top w4.2: U13.F2@693.52,1521.94 689.53,1521.94 689.53,1510.75 ccw(c693.97,1510.75) 693.97,1506.31 704.16,1506.31 ccw(c704.16,1511.43) 709.28,1511.43 709.28,1521.94 709.28,1571.2 709.28,1571.82 cw(c723.55,1571.82) 723.55,1586.08 834.93,1586.08 cw(c834.93,1559.35) 853.84,1578.25 869.41,1562.68 ccw(c883.33,1576.59) 883.33,1556.92 918.54,1556.92 cw(c918.54,1549.57) 925.89,1549.57 925.89,1546.92 cw(c918.54,1546.92) 918.54,1539.57 888.24,1539.57 ccw(c888.24,1532.22) 880.89,1532.22 880.89,1528.05 ccw(c888.24,1528.05) 888.24,1520.7 960.51,1520.7 cw(c960.51,1513.35) 967.86,1513.35 967.86,1511.46 cw(c960.51,1511.46) 960.51,1504.11 957.08,1504.11 ccw(c957.08,1496.76) 949.73,1496.76 949.73,1493.91 ccw(c957.08,1493.91) 957.08,1486.56 987.47,1486.56 cw(c987.47,1466.52) 1001.64,1480.69 1083.36,1398.98 ccw(c1102.82,1418.44) 1102.82,1390.91 U1.AE3@1105.34,1390.92
DQ19: U1.AD8 U13.F8 | length 732.8
  Top w4.2: U13.F8@693.52,1332.96 701.78,1324.71 cw(c684.06,1306.99) 709.12,1306.99 709.12,1296.87 ccw(c724.08,1296.87) 724.08,1281.9 918.8,1281.9 cw(c918.8,1274.55) 926.15,1274.55 926.15,1272.51 cw(c918.8,1272.51) 918.8,1265.16 819.54,1265.16 ccw(c819.54,1257.81) 812.19,1257.81 812.19,1256.11 ccw(c819.54,1256.11) 819.54,1248.76 918.93,1248.76 ccw(c918.93,1280.17) 941.14,1257.96 948.68,1265.5 cw(c972.26,1241.92) 972.26,1275.27 1111.22,1275.27 cw(c1111.22,1257.38) 1123.87,1270.03 U1.AD8@1130.93,1262.96
DQ20: U1.AE2 U13.H3 | length 694.3
  Top w4.2: U13.H3@630.53,1490.44 639.95,1499.87 ccw(c625.42,1514.4) 645.97,1514.4 645.97,1553.44 645.97,1580.25 cw(c653.32,1580.25) 653.32,1587.6 660.15,1587.6 ccw(c660.15,1594.95) 667.5,1594.95 667.5,1595.64 ccw(c660.15,1595.64) 660.15,1602.99 653.32,1602.99 cw(c653.32,1610.34) 645.97,1610.34 645.97,1611.48 cw(c653.32,1611.48) 653.32,1618.83 806.25,1618.83 cw(c806.25,1385.23) 971.43,1550.41 U1.AE2@1105.34,1416.51
DQ21: U1.AE8 U13.H8 | length 713.4
  Top w4.2: U13.H8@630.53,1332.96 621.2,1323.64 ccw(c637.3,1307.54) 614.53,1307.54 614.53,1298.26 ccw(c632.45,1298.26) 632.45,1280.35 687.8,1280.35 cw(c687.8,1262.51) 700.41,1275.13 703.54,1272 ccw(c720.04,1288.5) 720.04,1265.16 791.26,1265.16 cw(c791.26,1257.81) 798.61,1257.81 798.61,1256.27 cw(c791.26,1256.27) 791.26,1248.92 737.09,1248.92 ccw(c737.09,1241.57) 729.74,1241.57 729.74,1239.54 ccw(c737.09,1239.54) 737.09,1232.19 918.35,1232.19 ccw(c918.35,1280.98) 952.85,1246.48 960.54,1254.17 cw(c981.76,1232.96) 981.76,1262.96 U1.AE8@1105.34,1262.96
DQ22: U1.AD3 U13.G2 | length 600.8
  Top w4.2: U13.G2@662.03,1521.94 671.63,1531.55 ccw(c656.89,1546.29) 677.74,1546.29 677.74,1571.1 677.74,1573.15 cw(c704.19,1573.15) 704.19,1599.6 809.07,1599.6 cw(c809.07,1375.95) 967.21,1534.09 1094.56,1406.74 ccw(c1102.04,1414.22) 1102.04,1403.64 1112.17,1403.64 cw(c1112.17,1389.09) 1122.46,1399.38 U1.AD3@1130.93,1390.92
DQ23: U1.AE6 U13.H7 | length 617
  Top w4.2: U13.H7@630.53,1364.46 630.53,1373.45 cw(c637.88,1373.45) 637.88,1380.8 647.31,1380.8 ccw(c647.31,1388.15) 654.65,1388.15 ccw(c647.31,1388.17) 647.31,1395.52 622.85,1395.52 cw(c622.85,1402.87) 615.5,1402.77 ; U1.AE6@1105.34,1314.14 1086.67,1314.14 cw(c1086.67,1384.94) 1036.61,1334.88 982.03,1389.46 ccw(c932.15,1339.58) 932.15,1410.12 622.85,1410.12 ccw(c622.85,1402.77) 615.5,1402.87 ; 615.5,1402.77 cw(c622.85,1402.87) 615.5,1402.82 ; 615.5,1402.77 cw(c622.85,1402.77) 615.5,1402.82 ; 615.5,1402.77 cw(c622.85,1402.77) 615.5,1402.82 ; 615.5,1402.77 615.5,1402.87 ; 615.5,1402.82 cw(c622.85,1402.87) 615.5,1402.87 ; 615.5,1402.82 cw(c622.85,1402.87) 615.5,1402.87 ; 615.5,1402.82 cw(c622.85,1402.77) 615.5,1402.87
DQ24: U1.AC5 U13.D7 | length 717.8
  Top w4.2: U13.D7@756.51,1364.46 v1(772.26,1348.71) ; U1.AC5@1156.52,1339.73 v1(1167.56,1328.96)
  Bottom w4.2: v1(772.26,1348.71) 767.06,1353.92 cw(c788.26,1375.12) 758.27,1375.12 758.27,1381.33 cw(c772.24,1381.33) 772.24,1395.3 826.08,1395.3 ccw(c826.08,1402.65) 833.43,1402.65 833.43,1404.57 ccw(c826.08,1404.57) 826.08,1411.92 756.24,1411.92 cw(c756.24,1419.27) 748.89,1419.27 748.89,1421.38 cw(c756.24,1421.38) 756.24,1428.73 990.74,1428.73 cw(c990.74,1385.42) 1021.37,1416.04 1084.06,1353.35 ccw(c1116.33,1385.62) 1116.33,1339.98 1140.95,1339.98 cw(c1140.95,1302.34) 1145.64,1339.69 cw(c1140.95,1302.35) v1(1167.56,1328.96)
DQ25: U1.AB5 U13.C3 | length 683.2
  Top w4.2: v1(772.26,1506.19) U13.C3@788.01,1490.44 ; v1(1170.66,1351.18) U1.AB5@1182.11,1339.73
  Bottom w4.2: v1(772.26,1506.19) 780.89,1506.19 cw(c780.89,1498.84) 788.24,1498.84 788.24,1496.18 cw(c780.89,1496.18) 780.89,1488.83 733.54,1488.83 ccw(c733.54,1481.48) 726.19,1481.48 726.19,1481.1 ccw(c733.54,1481.1) 733.54,1473.75 752.96,1473.75 cw(c752.96,1466.4) 760.31,1466.4 760.31,1465.56 cw(c752.96,1465.56) 752.96,1458.21 742.03,1458.21 ccw(c742.03,1450.86) 734.68,1450.86 734.68,1450.01 ccw(c742.03,1450.01) 742.03,1442.66 988.72,1442.66 cw(c988.72,1378.13) 1034.34,1423.76 1090.56,1367.54 ccw(c1130.06,1407.04) 1130.06,1351.18 v1(1170.66,1351.18)
DQ26: U1.AC9 U13.C8 | length 626.3
  Top w4.2: U13.C8@788.01,1332.96 v1(803.76,1317.22) ; v1(1143.67,1250.22) U1.AC9@1156.52,1237.37
  Bottom w4.2: v1(803.76,1317.22) 803.76,1286.37 cw(c793.87,1286.37) 793.87,1276.48 780.72,1276.48 ccw(c780.72,1269.13) 773.37,1269.13 773.37,1267.32 ccw(c780.72,1267.32) 780.72,1259.97 820.59,1259.97 cw(c820.59,1252.62) 827.94,1252.62 827.94,1251.25 cw(c820.59,1251.25) 820.59,1243.9 782.86,1243.9 ccw(c782.86,1236.55) 775.51,1236.55 775.51,1236.15 ccw(c782.86,1236.15) 782.86,1228.8 1040.47,1228.8 ccw(c1040.47,1251.33) 1056.4,1235.39 1075.01,1254 cw(c1095.39,1233.63) 1095.39,1262.44 1114.16,1262.44 cw(c1114.16,1220.72) v1(1143.67,1250.22)
DQ27: U1.AC2 U13.C2 | length 609.7
  Top w4.2: U13.C2@788.01,1521.94 v1(803.76,1537.69) ; v1(1143.72,1429.3) U1.AC2@1156.52,1416.51
  Bottom w4.2: v1(803.76,1537.69) 828.08,1562.01 cw(c852.78,1537.3) 852.78,1572.24 908.94,1572.24 ccw(c908.94,1579.59) 916.29,1579.59 916.29,1581.31 ccw(c908.94,1581.31) 908.94,1588.66 858.28,1588.66 cw(c858.28,1596.01) 850.93,1596.01 850.93,1597.09 cw(c858.28,1597.09) 858.28,1604.44 898.09,1604.44 cw(c898.09,1509.14) 965.48,1576.53 1088.49,1453.51 ccw(c1109.67,1474.69) 1109.67,1444.74 1118.13,1444.74 1119.18,1444.74 cw(c1119.18,1422.89) 1134.62,1438.34 1143.66,1429.3 v1(1143.72,1429.3)
DQ28: U1.AC6 U13.A7 | length 675.9
  Top w4.2: U13.A7@851,1364.46 v1(869.95,1364.46) ; v1(1145.64,1325.03) U1.AC6@1156.52,1314.14
  Bottom w4.2: v1(869.95,1364.46) cw(c888.41,1364.46) 888.41,1382.92 989.44,1382.92 ccw(c989.44,1390.27) 996.79,1390.27 996.79,1391.12 ccw(c989.44,1391.12) 989.44,1398.47 852.4,1398.47 cw(c852.4,1405.82) 845.05,1405.82 845.05,1407.52 cw(c852.4,1407.52) 852.4,1414.87 986,1414.87 cw(c986,1373.42) 1015.31,1402.73 1073.43,1344.6 ccw(c1120.69,1391.86) 1120.69,1325.03 v1(1145.64,1325.03)
DQ29: U1.AC3 U13.A2 | length 670.1
  Top w4.2: U13.A2@851,1521.94 v1(866.75,1537.69) ; v1(1145.49,1401.29) U1.AC3@1156.52,1390.92
  Bottom w4.2: v1(866.75,1537.69) 856.9,1537.69 cw(c856.9,1545.04) 849.55,1545.04 849.55,1547.65 cw(c856.9,1547.65) 856.9,1555 964.47,1555 cw(c964.47,1547.65) 971.82,1547.65 971.82,1545.07 cw(c964.47,1545.07) 964.47,1537.72 895.3,1537.72 ccw(c895.3,1530.37) 887.95,1530.37 887.95,1527.53 ccw(c895.3,1527.53) 895.3,1520.18 999.98,1520.18 cw(c999.98,1512.83) 1007.33,1512.83 1007.33,1511 cw(c999.98,1511) 999.98,1503.65 980.93,1503.65 ccw(c980.93,1496.3) 973.58,1496.3 973.58,1493.93 ccw(c980.93,1493.93) 980.93,1486.58 999.69,1486.58 cw(c999.69,1401.89) 1059.58,1461.77 1109.6,1411.75 ccw(c1134.85,1437) 1134.85,1401.29 v1(1145.49,1401.29)
DQ30: U1.AC8 U13.B8 | length 670.2
  Top w4.2: U13.B8@819.51,1332.96 v1(835.25,1317.22) ; U1.AC8@1156.52,1262.96 v1(1168.92,1275.36)
  Bottom w4.2: v1(835.25,1317.22) 835.25,1278.03 ccw(c869.69,1278.03) 869.69,1243.6 969.12,1243.6 ccw(c969.12,1250.95) 976.47,1250.95 976.47,1251.67 ccw(c969.12,1251.67) 969.12,1259.02 874.47,1259.03 cw(c874.47,1266.38) 867.12,1266.38 867.12,1268.01 cw(c874.47,1268.01) 874.47,1275.36 v1(1168.92,1275.36)
DQ31: U1.AB4 U13.A3 | length 713.8
  Top w4.2: U13.A3@851,1490.44 v1(866.75,1506.19) ; v1(1170.02,1377.42) U1.AB4@1182.11,1365.33
  Bottom w4.2: v1(866.75,1506.19) 826.14,1506.19 ccw(c826.14,1498.84) 818.79,1498.84 818.79,1497.45 ccw(c826.14,1497.45) 826.14,1490.1 867.97,1490.1 cw(c867.97,1482.75) 875.32,1482.75 875.32,1480.88 cw(c867.97,1480.88) 867.97,1473.53 779.79,1473.53 ccw(c779.79,1466.18) 772.44,1466.18 772.44,1464.19 ccw(c779.79,1464.19) 779.79,1456.84 988.81,1456.84 cw(c988.81,1376.87) 1045.36,1433.42 1100.07,1378.71 ccw(c1141.01,1419.65) 1141.01,1361.75 1144.43,1361.75 1146.08,1361.75 ccw(c1146.08,1381.71) 1160.2,1367.6 v1(1170.02,1377.42)
DQS0: U1.AC19 U30.F3 | length 647.4
  Top w4.2: v1(677.77,860.52) 677.77,854.46 ccw(c687.46,854.46) 687.46,844.78 U30.F3@693.52,844.78 ; v1(1145.59,970.94) U1.AC19@1156.52,981.47
  Bottom w4.2: v1(677.77,860.52) 677.77,855.59 ccw(c694.12,855.59) 694.12,839.24 822.29,839.24 ccw(c822.29,906.95) 870.17,859.08 897.84,886.74 cw(c937.43,847.14) 937.43,903.14 972.18,903.14 ccw(c972.18,913.9) 982.94,913.9 982.94,916.34 ccw(c973.48,916.34) 973.48,925.8 971.64,925.8 cw(c971.64,945.34) 952.1,945.34 952.1,947.28 cw(c972.03,947.28) 972.03,967.22 1076.37,967.22 1141.86,967.22 v1(1145.59,970.94)
DQS0#: U1.AC20 U30.G3 | length 652.8
  Top w4.2: U30.G3@662.03,844.78 v1(677.77,829.03) ; U1.AC20@1156.52,955.88 v1(1167.92,967.22)
  Bottom w4.2: v1(677.77,829.03) 822.4,829.03 ccw(c822.4,906.66) 877.29,851.76 905.02,879.49 cw(c937.42,847.08) 937.42,892.91 972.19,892.91 ccw(c972.19,913.94) 993.22,913.94 993.22,916.35 ccw(c973.55,916.35) 973.55,936.02 971.95,936.02 cw(c971.95,945.63) 962.35,945.63 962.35,947.32 cw(c971.99,947.32) 971.99,956.96 1145.59,956.96 1146.35,956.96 ccw(c1146.35,983) 1164.76,964.59 1167.39,967.22 v1(1167.92,967.22)
DQS1: U1.AE23 U30.C7 | length 529.8
  Top w4.2: U30.C7@788.01,718.79 793.83,718.79 ccw(c793.83,727.48) 802.52,727.48 802.52,728.7 cw(c820.76,728.7) 820.76,746.95 930.63,746.95 ccw(c930.63,754.3) 937.98,754.3 937.98,757.58 ccw(c930.63,757.58) 930.63,764.93 889.94,764.93 cw(c889.94,783.49) 871.38,783.49 871.38,786.81 cw(c889.6,786.81) 889.6,805.03 954.73,805.03 ccw(c954.73,846.27) 983.89,817.11 1027.79,861.01 cw(c1064.67,824.13) 1064.67,876.28 1102.52,876.28 U1.AE23@1105.34,879.1
DQS1#: U1.AD23 U30.B7 | length 535.8
  Top w4.2: U30.B7@819.51,718.79 819.19,718.79 cw(c819.19,725.26) 812.72,725.26 812.72,728.7 cw(c820.77,728.7) 820.77,736.74 930.63,736.74 ccw(c930.63,754.42) 948.31,754.42 948.31,757.35 ccw(c930.49,757.35) 930.49,775.17 889.91,775.17 cw(c889.91,783.47) 881.61,783.47 881.61,786.57 cw(c889.86,786.57) 889.86,794.82 955.01,794.82 ccw(c955.01,845.66) 990.96,809.71 1034.72,853.47 cw(c1065.15,823.04) 1065.15,866.07 1108.81,866.07 ccw(c1108.81,888.02) 1124.33,872.5 U1.AD23@1130.93,879.1
DQS2: U1.AD5 U13.F3 | length 677.4
  Top w4.2: U13.F3@693.52,1490.44 ccw(c693.52,1483.28) 686.36,1483.28 686.36,1479.47 cw(c667.78,1479.47) 667.78,1460.88 613.95,1460.88 ccw(c613.95,1453.06) 606.12,1453.06 606.12,1451.63 ccw(c614.16,1451.63) 614.16,1443.6 945.7,1443.6 cw(c945.7,1342.44) 1017.23,1413.97 1068.22,1362.98 ccw(c1094.95,1389.71) 1094.95,1351.91 1110.05,1351.91 cw(c1110.05,1331.05) 1124.8,1345.8 U1.AD5@1130.9,1339.71
DQS2#: U1.AE5 U13.G3 | length 670.9
  Top w4.2: U13.G3@662.03,1490.44 668.3,1490.44 cw(c668.3,1482.68) 676.06,1482.68 676.06,1480.01 cw(c667.16,1480.01) 667.16,1471.1 613.9,1471.1 ccw(c613.9,1453.08) 595.87,1453.08 595.87,1451.63 ccw(c614.13,1451.63) 614.13,1433.37 945.54,1433.37 cw(c945.54,1342.04) 1010.11,1406.62 1061.18,1355.56 ccw(c1094.6,1388.98) 1094.6,1341.71 1103.36,1341.71 U1.AE5@1105.34,1339.73
DQS3: U1.AB7 U13.C7 | length 702.4
  Top w4.2: U13.C7@788.01,1364.46 v1(803.76,1348.71) ; v1(1171.35,1299.26) U1.AB7@1182.11,1288.55
  Bottom w4.2: v1(803.76,1348.71) 807.85,1344.62 ccw(c834.71,1371.49) 834.71,1333.49 866.9,1333.49 ccw(c866.9,1367.01) 890.6,1343.31 890.76,1343.47 cw(c908.22,1326.01) 908.22,1350.7 1026.54,1350.7 cw(c1026.54,1341.69) 1035.55,1341.69 1035.55,1340.76 cw(c1026.36,1340.76) 1026.36,1331.57 928.1,1331.57 ccw(c928.1,1312.75) 909.29,1312.75 909.29,1311.18 ccw(c927.29,1311.18) 927.29,1293.18 1156.65,1293.18 ccw(c1156.65,1313.96) v1(1171.35,1299.26)
DQS3#: U1.AB6 U13.B7 | length 692
  Top w4.2: U13.B7@819.51,1364.46 v1(835.25,1348.71) ; U1.AB6@1182.11,1314.14 v1(1192.59,1303.58)
  Bottom w4.2: v1(835.25,1348.71) 836.26,1347.7 ccw(c845.93,1357.37) 845.93,1343.7 866.82,1343.7 ccw(c866.82,1367.15) 883.4,1350.57 883.95,1351.12 cw(c908.06,1327.01) 908.06,1361.11 1026.12,1361.11 cw(c1026.12,1341.26) 1040.15,1355.29 1040.25,1355.2 cw(c1026.86,1341.81) 1045.79,1341.81 1045.79,1340.63 cw(c1026.52,1340.63) 1026.52,1321.36 928.85,1321.36 ccw(c928.85,1312.86) 920.35,1312.86 920.35,1311.25 ccw(c928.21,1311.25) 928.21,1303.39 1146.15,1303.39 ccw(c1146.15,1321.39) 1158.88,1308.66 1160.55,1310.33 cw(c1168.38,1302.5) 1168.38,1313.57 1171.35,1313.57 1175.35,1313.57 cw(c1175.35,1296.09) 1187.72,1308.45 v1(1192.59,1303.58)